# EAGLE board ACS770 breakout v0.2 (EAGLE 9.2.2)
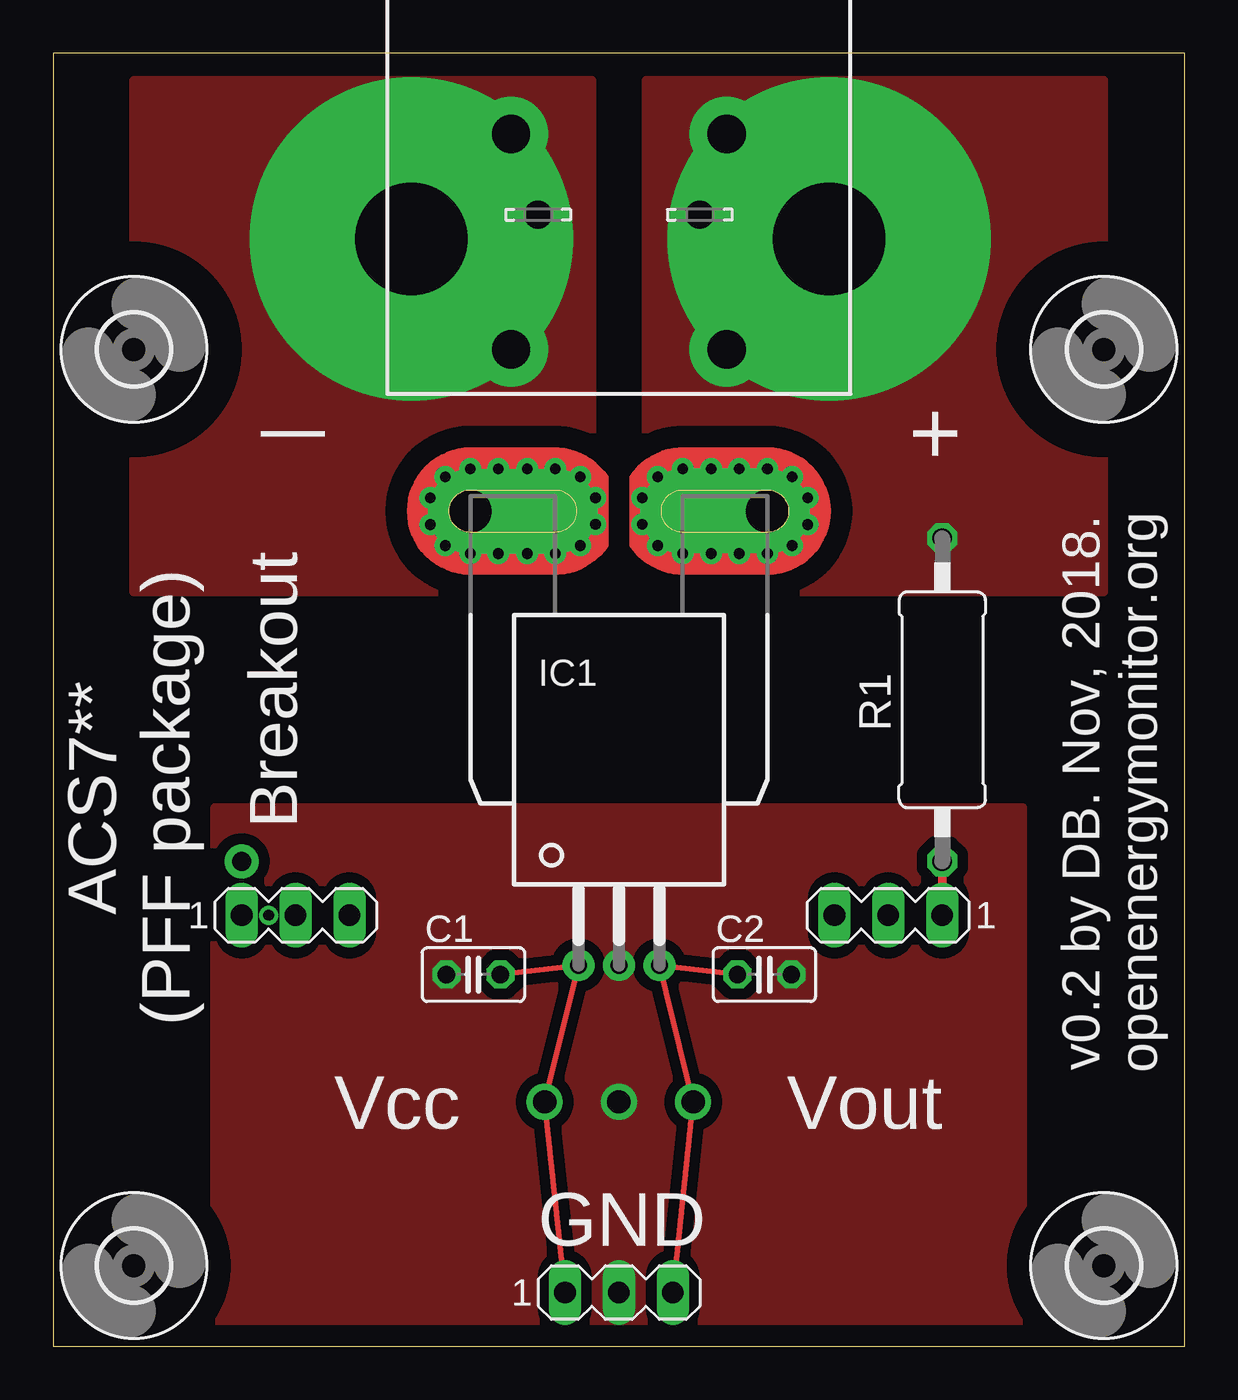
[diagram p0: board, top side]
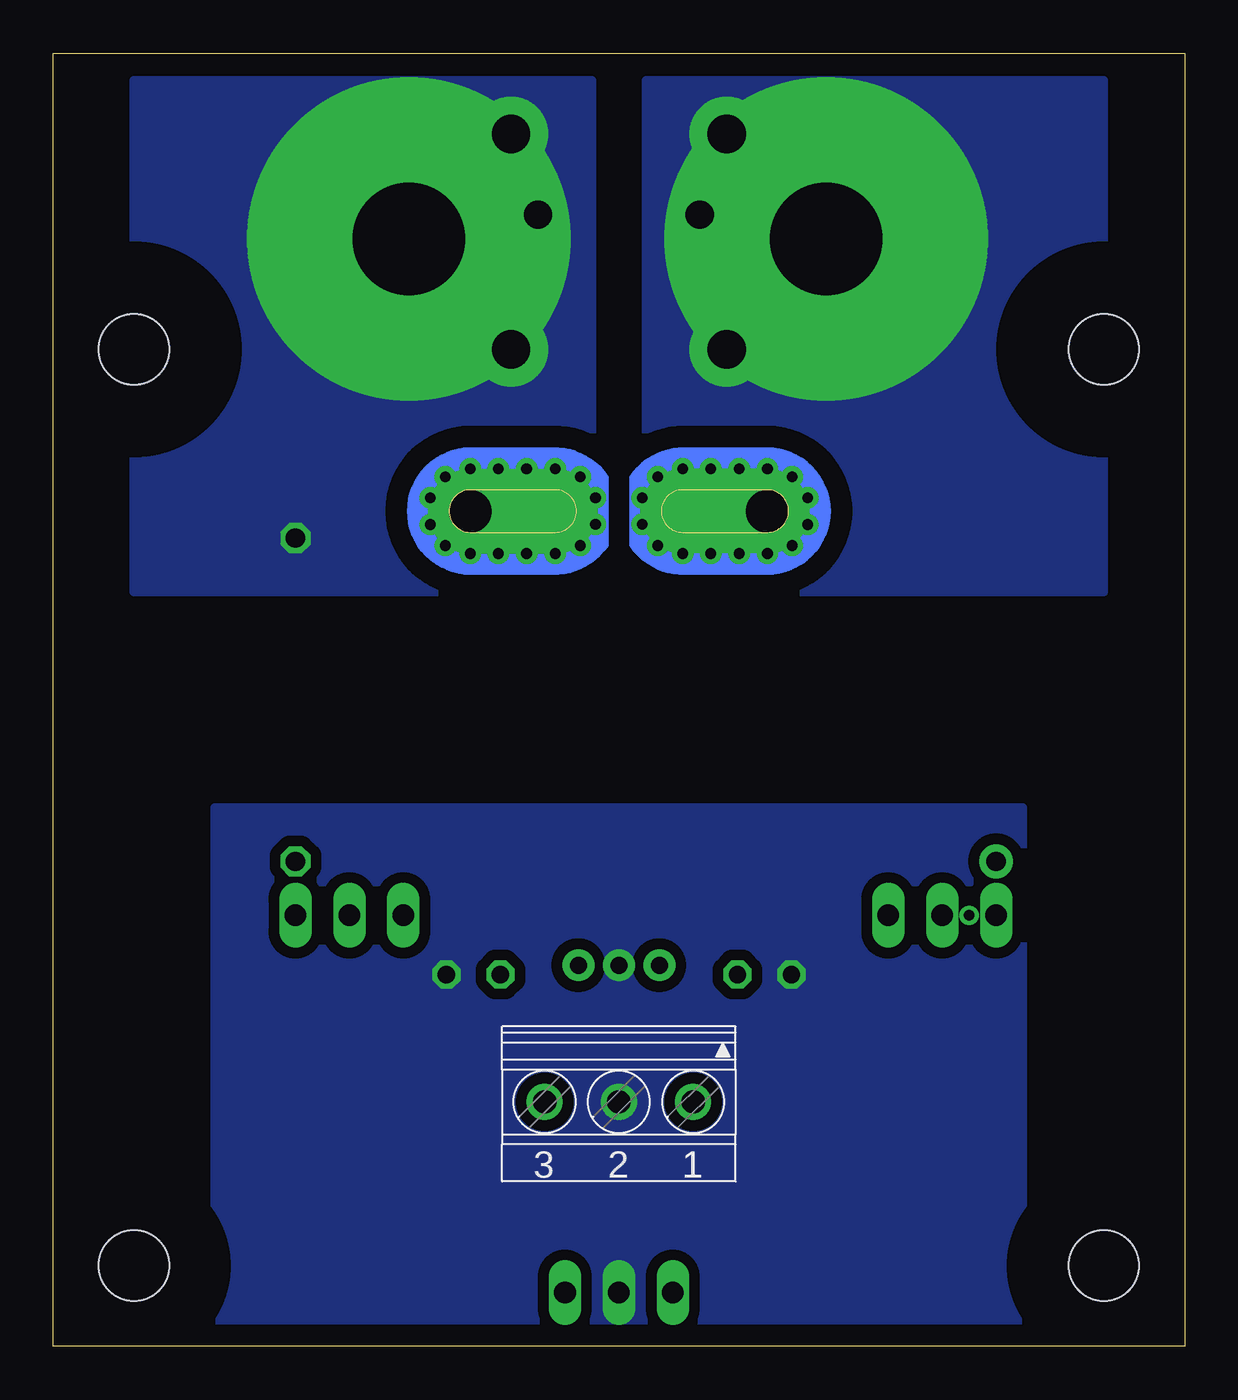
[diagram p1: board, bottom side, seen from below]

Size 53.34 x 60.96 mm. Coordinates in mm from the lower left corner, seen from the top.
Outline: 0,0 53.34,0 53.34,60.96 0,60.96 0,0
Copper layers (1*16): Top 0.035mm / dielectric 1.5mm / Bottom 0.035mm
Design rules "default": minimum track width 10mil, minimum drill 19mil, track to track 8mil, track to pad 8mil, pad to pad 8mil, via to via 8mil, smd to smd 8mil, copper to edge 40mil, drill to drill 8mil, minimum pad ring 10mil, minimum via ring 8mil, stop-mask expansion 4mil, vias tented up to drill 0mil, thermal gap 10mil

## Footprints (pad centres in the part's own frame; a part is rotated, then mirrored left to right if it is on the bottom)
C025-025X050 = drill 0.813 octagon: 1 -1.27,0; 2 1.27,0
CB-PFF = drill 0.8 pad 1.5: 1 -1.91,-21.4; 2 0,-21.4; 3 1.91,-21.4 | drill 2 pad 4 offset: IP+ 7,0; IP- -7,0 | drill 0.5 pad 0.9: IP+@2 8.89,0.635; IP+@3 8.89,-0.635; IP+@4 8.175,-1.625; IP+@5 7,-2; IP+@6 5.675,-2; IP+@7 4.35,-2; IP+@8 3,-2; IP+@9 1.825,-1.625; IP+@10 1.1,-0.625; IP+@11 1.1,0.625; IP+@12 1.825,1.625; IP+@13 3,2; IP+@14 4.35,2; IP+@15 5.675,2; IP+@16 7,2; IP+@17 8.175,1.625; IP-@2 -8.89,0.635; IP-@3 -8.89,-0.635; IP-@4 -8.175,-1.625; IP-@5 -7,-2; IP-@6 -5.675,-2; IP-@7 -4.325,-2; IP-@8 -3,-2; IP-@9 -1.825,-1.625; IP-@10 -1.1,-0.625; IP-@11 -1.1,0.625; IP-@12 -1.825,1.625; IP-@13 -3,2; IP-@14 -4.325,2; IP-@15 -5.675,2; IP-@16 -7,2; IP-@17 -8.175,1.625
LSP13 = drill 1.321 pad 2.159 octagon: MP 0,0
0411/15 = drill 0.914 octagon: 1 -7.62,0; 2 7.62,0
MA03-1 = drill 1.016 long: 1 -2.54,0; 2 0,0; 3 2.54,0
3,3 = hole 3.3: 0,0
2/10,16 = drill 1.8 pad 3.5: P$1 -5.08,0; P$2 -5.08,10.16; P$3 5.08,0; P$4 5.08,10.16
1751251 = drill 1.1 pad 1.7: 1 -3.5,-0.1; 2 0,-0.1; 3 3.5,-0.1

## Placement (x,y rotation side)
C1  1nF  [C025-025X050]  19.81,17.53 0 top
C2  1nF  [C025-025X050]  33.53,17.53 0 top
IC1  ACS770_PFF  [CB-PFF]  26.67,39.37 0 top
LSP1  LSP13  [LSP13]  30.48,53.34 0 top
LSP2  LSP13  [LSP13]  22.86,53.34 0 top
R1  1M  [0411/15]  41.91,30.48 270 top
SV1  [MA03-1]  26.67,2.54 0 top
SV2  [MA03-1]  39.37,20.32 180 top
SV3  [MA03-1]  11.43,20.32 0 top
U$1  [3,3]  3.81,46.99 0 top
U$2  [3,3]  49.53,46.99 0 top
U$3  [3,3]  49.53,3.81 0 top
U$4  [3,3]  3.81,3.81 0 top
U$5  MOLEX_39970-003  [2/10,16]  26.67,57.15 180 top
X1  1751251  [1751251]  26.67,11.43 180 bottom

## Library data of the parts
C1 C2 = rcl7
IC1 = allegro; MPN: ACS758LCB-050B-PFF-T; OC_FARNELL: 1718997; OC_NEWARK: 04R7131
LSP1 LSP2 = solpad
R1 = rcl
SV1-SV3 = con-lstb; OC_FARNELL: unknown; OC_NEWARK: unknown
U$1-U$4 = holes
U$5 = 10.16mm terminal block
X1 = con-phoenix-350; OC_FARNELL: unknown; OC_NEWARK: unknown

## Nets
GND: C1.1 C2.2 IC1.2 SV1.2 X1.2
N$1: C1.2 IC1.1 SV1.1 X1.1
N$2: R1.2 SV2.1
N$3: C2.1 IC1.3 SV1.3 X1.3
N$4: IC1.IP- IC1.IP-@2 IC1.IP-@3 IC1.IP-@4 IC1.IP-@5 IC1.IP-@6 IC1.IP-@7 IC1.IP-@8 IC1.IP-@9 IC1.IP-@10 IC1.IP-@11 IC1.IP-@12 IC1.IP-@13 IC1.IP-@14 IC1.IP-@15 IC1.IP-@16 IC1.IP-@17 LSP2.MP U$5.P$3 U$5.P$4
N$5: IC1.IP+ IC1.IP+@2 IC1.IP+@3 IC1.IP+@4 IC1.IP+@5 IC1.IP+@6 IC1.IP+@7 IC1.IP+@8 IC1.IP+@9 IC1.IP+@10 IC1.IP+@11 IC1.IP+@12 IC1.IP+@13 IC1.IP+@14 IC1.IP+@15 IC1.IP+@16 IC1.IP+@17 LSP1.MP R1.1 U$5.P$1 U$5.P$2

## Tracks (layer width: path | path; a pad name or v marks a point on that pad's centre or on a via)
GND
  pour Top (isolate 0.508, no thermals): 7.62,25.4 45.72,25.4 45.72,0 7.62,0
  pour Bottom (isolate 0.508, no thermals): 45.72,25.4 7.62,25.4 7.62,0 45.72,0
N$1
  Top 0.254: C1.2 IC1.1 X1.1 SV1.1
N$2
  Top 0.406: R1.2 SV2.1
N$3
  Top 0.254: SV1.3 X1.3 IC1.3 C2.1
N$4  (via drill 5.3 pad 15.24)
  other vias: 16.89,52.2
  pour Top (isolate 1.016, no thermals): 25.4,35.56 3.81,35.56 3.81,59.69 25.4,59.69
  pour Bottom (isolate 1.016, no thermals): 25.4,35.56 3.81,35.56 3.81,59.69 25.4,59.69
N$5  (via drill 5.3 pad 15.24)
  other vias: 36.58,52.2
  pour Top (isolate 1.016, no thermals): 49.53,35.56 27.94,35.56 27.94,59.69 49.53,59.69
  pour Bottom (isolate 1.016, no thermals): 49.53,35.56 27.94,35.56 27.94,59.69 49.53,59.69
N$6  (via drill 0.5)
  other vias: 10.16,20.32
N$7  (via drill 0.9 pad 1.6)
  other vias: 8.89,22.86

## Text on the board
tNames: | | + | Breakout | ACS7** / (PFF package) | v0.2 by DB. Nov, 2018. / openenergymonitor.org | Vcc | Vout | GND